# Altium PCB LED-kube-kontrollerkort_v0-0-1.PcbDoc
Units mm, origin at the board's own origin, x right, y up, seen from the top; angles counter-clockwise.
Board outline 60 x 72 mm, 2 copper layers (Top Layer, Bottom Layer); 18 components, 54 nets, 170 pads, 20 vias.
Unrouted connection lines stored in the file: 21.
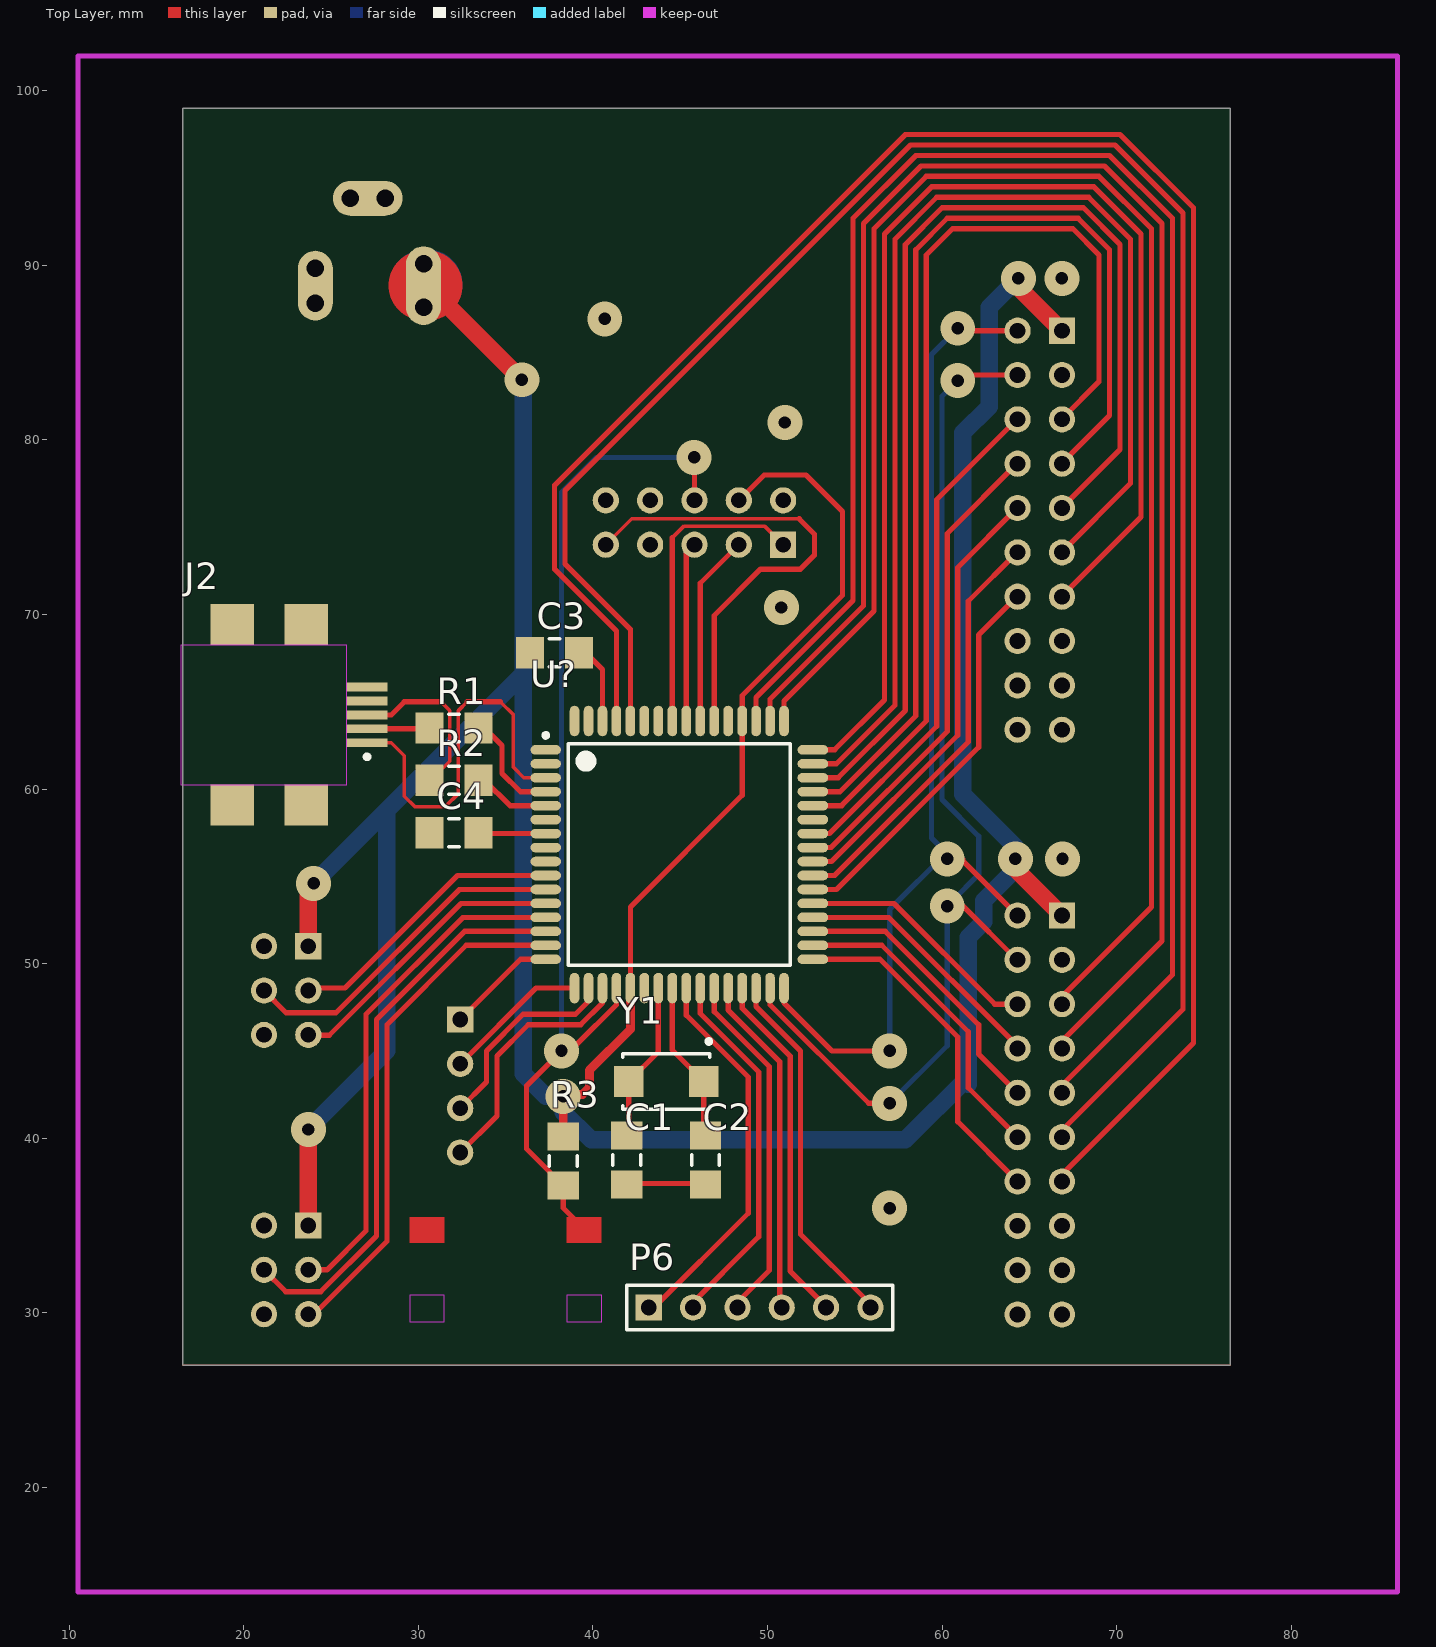
[diagram p0: Top Layer view]
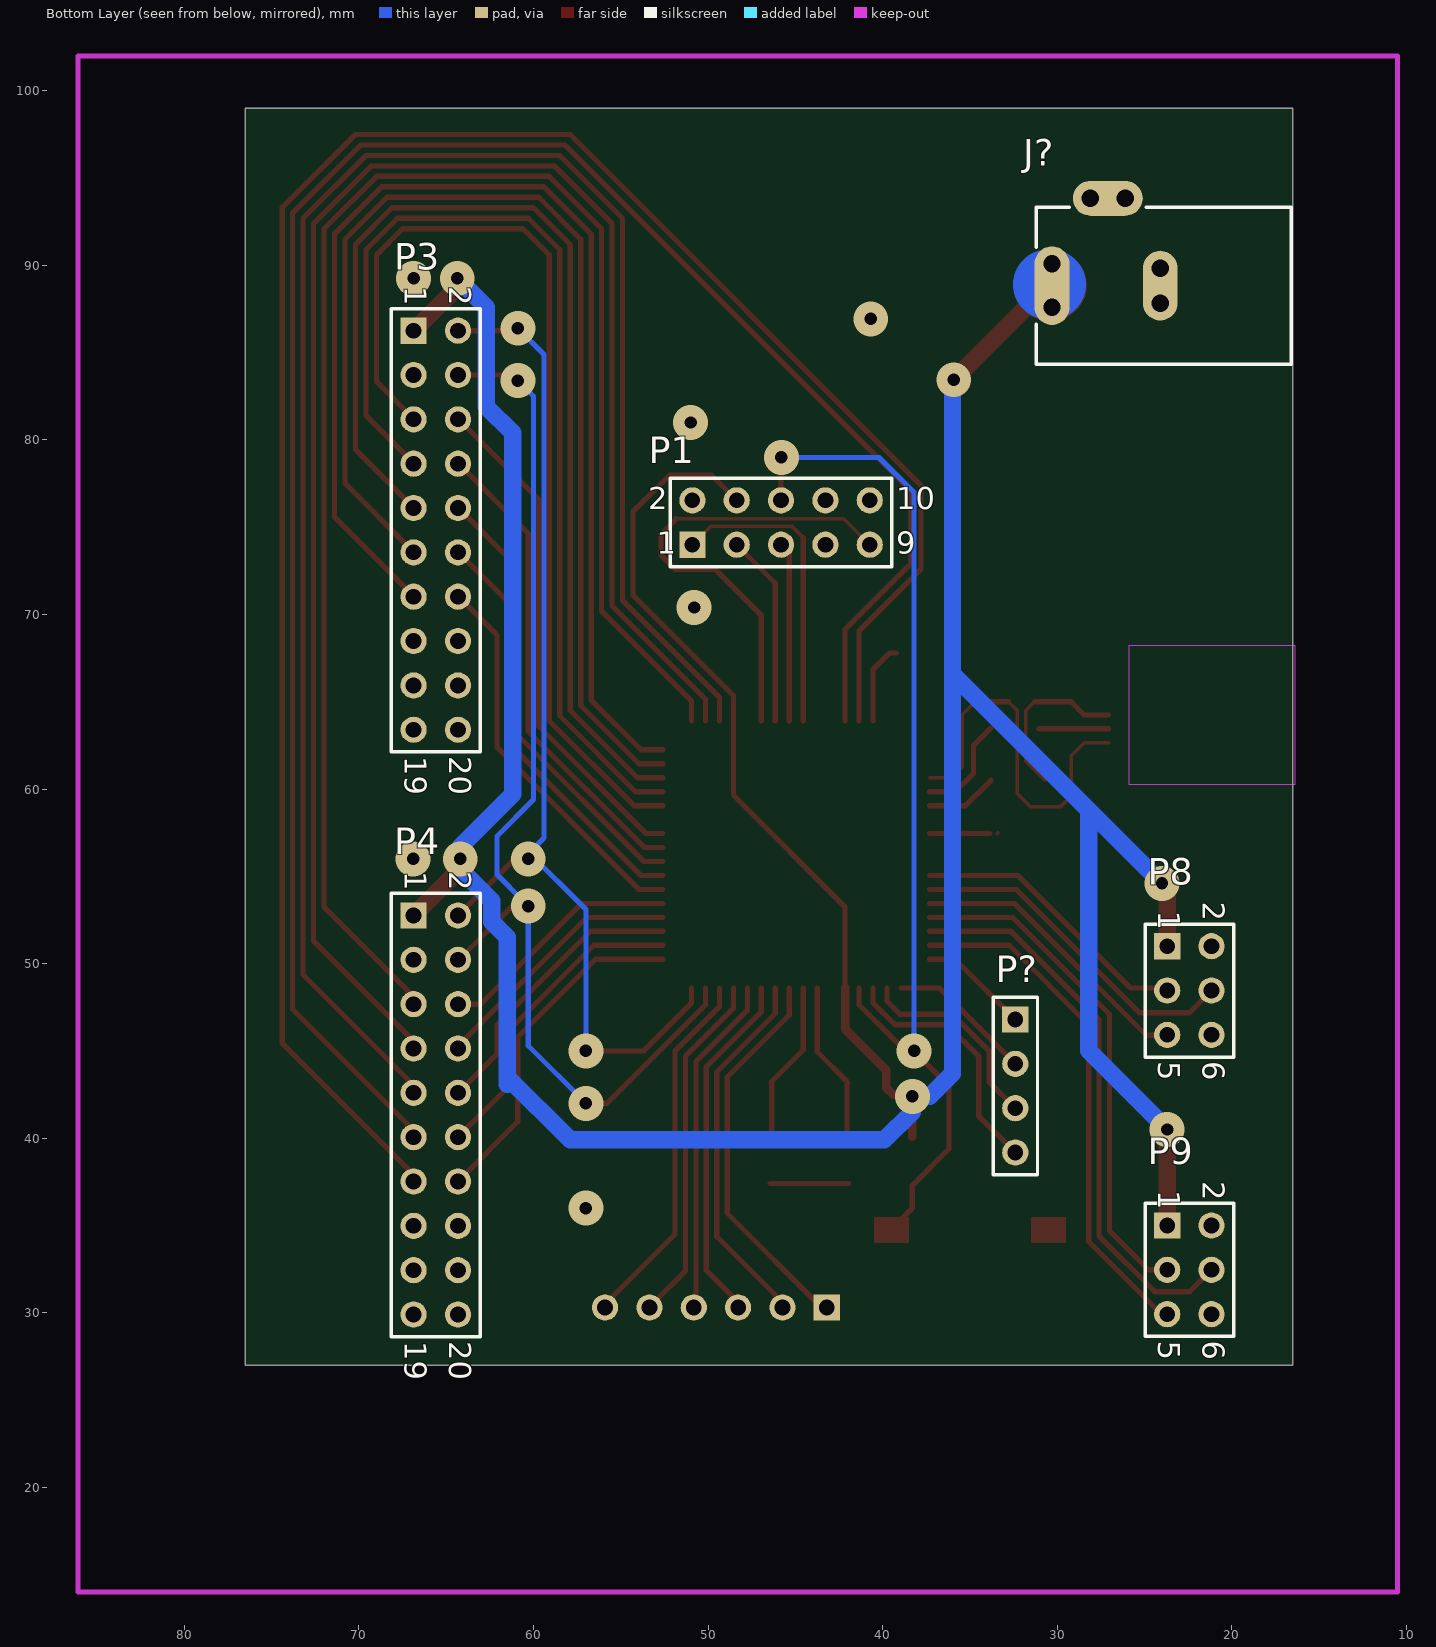
[diagram p1: Bottom Layer view, seen from below]

## Layer stack, top to bottom
Top Layer: signal copper 0.0356
Dielectric: core 0.32, FR-4, Dk 4.8
Bottom Layer: signal copper 0.0356

## Board outline
76.5,99 76.5,27 16.5,27 16.5,99

## Design rules (kind name [scope] priority, off if disabled: settings)
AssemblyTestPointUsage [All] p1 off:
AssemblyTestpoint [All] p1 off: testpointundercomponent=TRUE minsize=1.016 maxsize=2.54 preferedsize=1.524 minholesize=0 maxholesize=1.016 preferedholesize=0.813 testpointgrid=0.025 usegrid=TRUE gridtolerance=0 allowsidetop=TRUE allowsidebottom=TRUE
Clearance [All] p1: gap=0.2
DiffPairsRouting [All] p1: maxlimit=0.254 minlimit=0.254 mostfreqgap=0.254 maxuncoupledlength=12.7
FabricationTestPointUsage [All] p1 off: valid=0 allowmultiple=FALSE
FabricationTestpoint [All] p1 off: side=3 testpointundercomponent=TRUE minsize=1.016 maxsize=2.54 preferedsize=1.524 minholesize=0 maxholesize=1.016 preferedholesize=0.813 testpointgrid=0.025 allowsidetop=TRUE allowsidebottom=TRUE usegrid=TRUE gridtolerance=0
Height [All] p1 off: minheight=0 maxheight=25.4 prefheight=12.7
HoleToHoleClearance [All] p1: gap=0.2 allowstackedmicrovias=TRUE
MinimumSolderMaskSliver [All] p1 off: minsoldermaskwidth=0.254
PasteMaskExpansion [All] p1 off: expansion=0
PlaneClearance [All] p1: clearance=0.5
PlaneConnect [All] p1: planeconnectstyle=Relief reliefexpansion=0.508 reliefentries=4 reliefconductorwidth=0.3 reliefairgap=0.3
PolygonConnect [All] p1: connectstyle=Relief reliefconductorwidth=0.3 reliefentries=4 polygonreliefangle="90 Angle"
RoomDefinition LED-kube-kontrollerkort_v0-0-1 [InComponentClass('LED-kube-kontrollerkort_v0-0-1')] p1 off: confinementstyle=ConfineIn formatcopy=TRUE lockcomponents=FALSE outline 94.888,51.915 178.2,51.915 178.2,84.3 94.888,84.3
RoutingVias [All] p1: holewidth=1 width=2 viastyle="Through Hole" minholewidth=0.5 minwidth=1 maxholewidth=1 maxwidth=2.5
SMDToPlane [All] p1: distance=118110
SilkToSilkClearance [All] p1 off: silktosilkclearance=0.254
SilkscreenOverComponentPads [All] p1 off: minsilkscreentomaskgap=0.254
SolderMaskExpansion [All] p1 off: expansion=0.102
Width [All] p1: maxlimit=2 minlimit=0.2 preferedwidth=0.3
15 further rules are at their usual default settings.

## Classes and differential pairs
differential pair D: +D_P -D_N
differential pair D1: +D1_P -D1_N

## Components (designator, comment, footprint, x,y, rotation, side; value= is the part's Value field where it differs from the comment)
C1 "Cap Semi" 8-1206 41.95,38.75 r90 top
C2 "Cap Semi" 8-1206 46.45,38.75 r90 top
C3 "Cap Semi" 8-1206 37.8,67.8 r0 top
C4 "Cap Semi" 8-1206 32.05,57.5 r0 top
J2 "Mini_USB" 481900001 23.2,64.25 r180 top
J? "PWR2.5" KLD-0202 16.6,88.84 r0 bottom
P1 "JTAG" HDR2X5 50.9,74 r180 bottom
P3 "Header 10X2" HDR2X10 66.87,86.26 r270 bottom
P4 "Header 10X2" HDR2X10 66.87,52.76 r270 bottom
P6 "UART" HDR1X6 43.2,30.3 r0 top
P8 "NES_A" HDR2X3 23.7,51 r270 bottom
P9 "NES_B" HDR2X3 23.7,35 r270 bottom
P? "Header 4" HDR1X4 32.4,46.8 r270 bottom
R1 "" 8-1206 32.05,63.5 r0 top
R2 "" 8-1206 32.05,60.5 r0 top
R3 "5k" 8-1206 38.3,38.7 r270 top
U? "AT90USB1287-AU" 64MD_N 44.95,56.25 r0 top
Y1 "4SMX" 4SMX 44.2,43.25 r180 top

## Footprints (in the part's own frame and the unit in brackets; to place one, negate y for a bottom-side part, rotate by r counter-clockwise, add the part's x,y. Pads: shape width x height; smd on the part's side, far side on the other; paste and mask are expansions set on the pad)
4SMX [mm] "Surface Mount Quartz Crystal; Body 5.2 x 3.4 mm (LxW max)"
  rect 1.7x1.8 smd: 1(-2.15,0) 2(2.15,0)
  silkscreen extent -2.57,-2.42 2.5,1.6
8-1206 [mm] "Chip Resistor; Body 3.1 x 1.6 mm (LxW typ)"
  rect 1.6x1.8 smd: 1(-1.4,0) 2(1.4,0)
  silkscreen extent -0.3,-0.8 0.3,0.8
64MD_N [mm] "Thin QFP, 64-Leads, Body 14x14mm, Pitch 0.8mm, IPC Medium Density"
  oval 1.75x0.55 smd: 1(-7.65,6) 2(-7.65,5.2) 3(-7.65,4.4) 4(-7.65,3.6) 5(-7.65,2.8) 6(-7.65,2) 7(-7.65,1.2) 8(-7.65,0.4) 9(-7.65,-0.4) 10(-7.65,-1.2) 11(-7.65,-2) 12(-7.65,-2.8) 13(-7.65,-3.6) 14(-7.65,-4.4) 15(-7.65,-5.2) 16(-7.65,-6) 33(7.65,-6) 34(7.65,-5.2) 35(7.65,-4.4) 36(7.65,-3.6) 37(7.65,-2.8) 38(7.65,-2) 39(7.65,-1.2) 40(7.65,-0.4) 41(7.65,0.4) 42(7.65,1.2) 43(7.65,2) 44(7.65,2.8) 45(7.65,3.6) 46(7.65,4.4) 47(7.65,5.2) 48(7.65,6)
  oval 0.55x1.75 smd: 17(-6,-7.65) 18(-5.2,-7.65) 19(-4.4,-7.65) 20(-3.6,-7.65) 21(-2.8,-7.65) 22(-2,-7.65) 23(-1.2,-7.65) 24(-0.4,-7.65) 25(0.4,-7.65) 26(1.2,-7.65) 27(2,-7.65) 28(2.8,-7.65) 29(3.6,-7.65) 30(4.4,-7.65) 31(5.2,-7.65) 32(6,-7.65) 49(6,7.65) 50(5.2,7.65) 51(4.4,7.65) 52(3.6,7.65) 53(2.8,7.65) 54(2,7.65) 55(1.2,7.65) 56(0.4,7.65) 57(-0.4,7.65) 58(-1.2,7.65) 59(-2,7.65) 60(-2.8,7.65) 61(-3.6,7.65) 62(-4.4,7.65) 63(-5.2,7.65) 64(-6,7.65)
  silkscreen extent -7.77,-6.35 6.35,6.95, body extent -7,-7 7,7, height 1.2
481900001 [mm] "Connector; USB Mini-B, Sinking Type, SM; 5 Position; Right Angle"
  rect 2.35x0.5 smd: 1(-3.862,1.6) 2(-3.863,0.8) 3(-3.863,0) 4(-3.863,-0.8) 5(-3.863,-1.6)
  rect 2.5x2.35 smd: MH1(-0.387,-5.175) MH2(3.862,-5.175) MH3(3.862,5.175) MH4(-0.387,5.175)
  Keep-Out Layer region: -2.687,-4 6.813,-4 6.813,4 -2.687,4
  silkscreen extent -3.99,2.28 -3.74,2.52, body extent -1.8,-3.84 6.8,3.86, height 0.35
HDR1X4 [mm] "Connector; Header; 4 Position"
  rect 1.5x1.5 hole 0.9: 1(0,0)
  round 1.5 hole 0.9: 2(2.54,0) 3(5.08,0) 4(7.62,0)
  silkscreen extent -1.27,-1.27 8.89,1.27
HDR1X6 [mm] "Connector; Header; 6 Position"
  rect 1.5x1.5 hole 0.9: 1(0,0)
  round 1.5 hole 0.9: 2(2.54,0) 3(5.08,0) 4(7.62,0) 5(10.16,0) 6(12.7,0)
  silkscreen extent -1.27,-1.27 13.97,1.27
HDR2X3 [mm] "Connector; Header; 3x2 Position"
  rect 1.5x1.5 hole 0.9: 1(0,0)
  round 1.5 hole 0.9: 2(0,2.54) 3(2.54,0) 4(2.54,2.54) 5(5.08,0) 6(5.08,2.54)
  silkscreen extent -1.27,-1.27 6.35,3.81
HDR2X5 [mm] "Connector; Header; 5x2 Position"
  rect 1.5x1.5 hole 0.9: 1(0,0)
  round 1.5 hole 0.9: 2(0,2.54) 3(2.54,0) 4(2.54,2.54) 5(5.08,0) 6(5.08,2.54) 7(7.62,0) 8(7.62,2.54) 9(10.16,0) 10(10.16,2.54)
  silkscreen extent -1.27,-1.27 11.43,3.81
HDR2X10 [mm] "Connector; Header; 10x2 Position"
  rect 1.5x1.5 hole 0.9: 1(0,0)
  round 1.5 hole 0.9: 2(0,2.54) 3(2.54,0) 4(2.54,2.54) 5(5.08,0) 6(5.08,2.54) 7(7.62,0) 8(7.62,2.54) 9(10.16,0) 10(10.16,2.54) 11(12.7,0) 12(12.7,2.54) 13(15.24,0) 14(15.24,2.54) 15(17.78,0) 16(17.78,2.54) 17(20.32,0) 18(20.32,2.54) 19(22.86,0) 20(22.86,2.54)
  silkscreen extent -1.27,-1.27 24.13,3.81
KLD-0202 [mm] "DC Power Jack, 2.5mm, KLD Series, PCB Mount"
  oval 2x4.5 all layers, no hole: 1(13.7,0)
  round 1.5 hole 1: 1A(13.7,-1.25) 1B(13.7,1.25) 2A(7.5,-1) 2B(7.5,1) 3A(9.5,-5) 3B(11.5,-5)
  oval 2x4 all layers, no hole: 2(7.5,0)
  oval 4x2 all layers, no hole: 3(10.5,-5)
  silkscreen extent 0,-4.5 14.6,4.5

## Part data
C1 C2 C3 C4: "Capacitor (Semiconductor SIM Model)"
J2: "USB 2.0, Right Angle, SMT, B Type, Receptacle, 5 Position, Black"
J?: "Low Voltage Power Supply Connector"
P1: library part "Header 5X2", "Header, 5-Pin, Dual row"
P3 P4: "Header, 10-Pin, Dual row"
P6: library part "Header 6", "Header, 6-Pin"
P8 P9: library part "Header 3X2", "Header, 3-Pin, Dual row"
P?: "Header, 4-Pin"
R1 R2: library part Res3, "Resistor"
R3: library part ERJP08J, "Anti-Surge Thick Film Chip Resistor, 10 Ohm to 1M Ohm Range, 5% Tolerance, 1206 Size, 0.25 W"
U?: "8-bit AVR Microcontroller, 2.7-5.5V, 128KB Flash, 4KB EEPROM, 8KB SRAM, USB OTG Host, 64-pin TQFP, Industrial Grade (-40°C to 85°C)"
Y1: "Surface Mount Quartz Crystal"

## Via types
v1: diameter 2, hole 0.711, Top Layer to Bottom Layer, 20 vias

## Nets (pads, with @x,y where several pads share a name; then routed paths per layer and width w, separated by ;. In a path a pad name is that pad's centre, name@x,y a point inside that pad or via, vN(x,y) a via of type N, cw(c..) or ccw(c..) an arc to the next point about the centre after c; other vN are vias at no path point)
C0: P4.13 U?.61 | length 120.1
  Top Layer w0.3: U?.61 41.35,69.05 37.8,72.6 37.8,77.4 57.9,97.5 70.2,97.5 74.4,93.3 74.4,45.45 P4.13@66.87,37.92
C1: P4.11 U?.60 | length 115.4
  Top Layer w0.3: U?.60 42.15,69.15 38.4,72.9 38.4,77.1 58.2,96.9 69.9,96.9 73.8,93 73.8,47.39 P4.11@66.87,40.46
C2: P4.9 U?.51 | length 104.6
  Top Layer w0.3: U?.51 49.35,65.25 54.9,70.8 54.9,92.7 58.5,96.3 69.6,96.3 73.2,92.7 73.2,49.36 P4.9@66.9,43.06
C3: P4.7 U?.50 | length 99.7
  Top Layer w0.3: U?.50 50.15,65.15 55.5,70.5 55.5,92.4 58.8,95.7 69.3,95.7 72.6,92.4 72.6,51.3 P4.7@66.9,45.6
C4: P4.5 U?.49 | length 94.8
  Top Layer w0.3: U?.49 50.95,65.05 56.1,70.2 56.1,92.1 59.1,95.1 69,95.1 72,92.1 72,53.24 P4.5@66.9,48.14
C5: P3.13 U?.48 | length 71.5
  Top Layer w0.3: U?.48 53.85,62.25 56.7,65.1 56.7,91.8 59.4,94.5 68.7,94.5 71.4,91.8 71.4,75.58 P3.13@66.9,71.08
C6: P3.11 U?.47 | length 67.8
  Top Layer w0.3: U?.47 53.95,61.45 57.3,64.8 57.3,91.5 59.7,93.9 68.4,93.9 70.8,91.5 70.8,77.52 P3.11@66.9,73.62
C7: P3.9 U?.46 | length 64
  Top Layer w0.3: U?.46 54.05,60.65 57.9,64.5 57.9,91.2 60,93.3 68.1,93.3 70.2,91.2 70.2,79.46 P3.9@66.9,76.16
C8: P3.7 U?.45 | length 60.3
  Top Layer w0.3: U?.45 54.15,59.85 58.5,64.2 58.5,90.9 60.3,92.7 67.8,92.7 69.6,90.9 69.6,81.4 P3.7@66.9,78.7
C9: P3.5 U?.44 | length 56.6
  Top Layer w0.3: U?.44 54.25,59.05 59.1,63.9 59.1,90.6 60.6,92.1 67.5,92.1 69,90.6 69,83.34 P3.5@66.9,81.24
D1_N: J2.2 R1.1 | length 4.1
  Top Layer w0.2: R1.1@30.65,63.45 R1.1@30.7,63.5
  Top Layer w0.3: J2.2 R1.1@31.05,63.45
D1_P: J2.3 R2.1 | length 9.7
  Top Layer w0.2: R2.1@30.7,60.5 31.8,61.6 31.8,64.5 31.3,65
  Top Layer w0.3: J2.3 28.45,64.25 29.2,65 31.3,65
D_N: R1.2 U?.4 | length 5.9
  Top Layer w0.3: R1.2@33.8,63.5 34.8,62.5 34.8,60.9 35.85,59.85 U?.4
D_P: R2.2 U?.5 | length 4.1
  Top Layer w0.3: R2.2@33.8,60.5 35.25,59.05 U?.5
GND: C1.1 C2.1 C3.1 C4.1 J2.4 J2.5 J?.2 J?.2A J?.2B J?.3 J?.3A J?.3B P1.2 P1.10 P3.3 P4.3 P8.2 P9.2 U?.22 U?.53 U?.63 | length 4.5
  Top Layer w0.3: C1.1@41.95,37.4 C2.1@46.45,37.4
  other v1: 57,36 66.9,56 50.8,70.4 51,81 40.68,86.94 66.87,89.26
L0: P3.6 U?.42 | length 29.2
  Top Layer w0.3: U?.42 53.55,57.45 59.7,63.6 59.7,76.58 P3.6@64.36,81.24
L1: P3.8 U?.41 | length 27.5
  Top Layer w0.3: U?.41 53.65,56.65 60.3,63.3 60.3,74.64 P3.8@64.36,78.7
L2: P3.10 U?.40 | length 25.8
  Top Layer w0.3: U?.40 53.67,55.85 60.9,63.08 60.9,72.7 P3.10@64.36,76.16
L3: P3.12 U?.39 | length 24.2
  Top Layer w0.3: U?.39 53.85,55.05 61.5,62.7 61.5,70.76 P3.12@64.36,73.62
L4: P3.14 U?.38 | length 22.5
  Top Layer w0.3: U?.38 53.95,54.25 62.1,62.4 62.1,68.82 P3.14@64.36,71.08
L5: P4.6 U?.37 | length 14.1
  Top Layer w0.3: U?.37 57.25,53.45 63.02,47.68 P4.6
L6: P4.8 U?.36 | length 14.7
  Top Layer w0.3: U?.36 56.95,52.65 64.06,45.54 P4.8@64.33,45.54
L7: P4.10 U?.35 | length 16.5
  Top Layer w0.3: U?.35 56.75,51.85 62.1,46.5 62.1,44.83 P4.10
L8: P4.12 U?.34 | length 18.2
  Top Layer w0.3: U?.34 56.55,51.05 61.5,46.1 61.5,42.89 P4.12
L9: P4.14 U?.33 | length 19.8
  Top Layer w0.3: U?.33 56.45,50.25 60.9,45.8 60.9,40.95 P4.14
NES_A_CLOCK: P8.4 U?.11 | length 19.6
  Top Layer w0.3: P8.4 22.43,47.19 25.29,47.19 32.35,54.25 U?.11
NES_A_DATA: P8.5 U?.12 | length 16.7
  Top Layer w0.3: P8.5@23.72,45.9 24.9,45.9 32.45,53.45 U?.12
NES_A_STROBE: P8.3 U?.10 | length 16.3
  Top Layer w0.3: P8.3 23.84,48.6 25.8,48.6 32.25,55.05 U?.10
NES_B_CLOCK: P9.4 U?.14 | length 32.5
  Top Layer w0.3: P9.4 22.41,31.21 24.41,31.21 27.6,34.4 27.6,46.8 32.65,51.85 U?.14
NES_B_DATA: P9.5 U?.15 | length 29.6
  Top Layer w0.3: P9.5 24.02,29.92 28.2,34.1 28.2,46.5 32.75,51.05 U?.15
NES_B_STROBE: P9.3 U?.13 | length 29.2
  Top Layer w0.3: P9.3 24.76,32.46 27,34.7 27,47.1 32.55,52.65 U?.13
NetC1_2: C1.2 U?.23 Y1.2 | length 9.4
  Top Layer w0.2: C1.2@41.95,40.1 C1.2@42.05,40.2 ; Y1.2@41.95,43.15 Y1.2
  Top Layer w0.3: C1.2@42.05,40.2 Y1.2 43.75,44.95 U?.23
NetC2_2: C2.2 U?.24 Y1.1 | length 9.4
  Top Layer w0.2: C2.2@46.35,40.2 C2.2@46.45,40.1 ; Y1.1 Y1.1@46.45,43.15
  Top Layer w0.3: U?.24 44.55,45.05 Y1.1 C2.2@46.35,40.2
NetC3_2: C3.2 U?.62 | length 4.7
  Top Layer w0.3: C3.2 39.6,67.8 40.55,66.85 U?.62
NetC4_2: C4.2 U?.7 | length 3.5
  Top Layer w0.2: C4.2@33.4,57.5 C4.2@33.45,57.45
  Top Layer w0.3: C4.2@33.85,57.45 U?.7
PB6: P?.1 U?.16 | length 6.3
  Top Layer w0.3: P?.1 35.85,50.25 U?.16
PB7: P?.2 U?.17 | length 8.3
  Top Layer w0.3: P?.2 36.74,48.6 U?.17
PD0: P6.1 U?.25 | length 22.6
  Top Layer w0.3: P6.1@42.9,30.3 43.5,30.3 48.9,35.7 48.9,43.5 45.35,47.05 U?.25
PD1: P6.2 U?.26 | length 21.4
  Top Layer w0.3: P6.2@45.44,30.3 49.5,34.36 49.5,43.8 46.15,47.15 U?.26
PD2: P6.3 | length 20.5
  Top Layer w0.3: 46.95,48.6 46.95,47.25 50.1,44.1 50.1,32.42 P6.3@47.98,30.3
PD3: P6.4 | length 19.5
  Top Layer w0.3: 47.75,48.6 47.75,47.35 50.7,44.4 P6.4@50.7,30.3
PD4: P6.5 U?.29 | length 20.2
  Top Layer w0.3: U?.29 48.55,47.45 51.3,44.7 51.3,32.4 53.06,30.64 P6.5@53.06,30.3
PD5: P6.6 U?.30 | length 20.9
  Top Layer w0.3: U?.30 49.35,47.55 51.9,45 51.9,34.5 55.6,30.8 P6.6@55.6,30.3
PE4: P?.3 U?.18 | length 11.7
  Top Layer w0.3: P?.3 33.9,43.22 33.9,45 36,47.1 39,47.1 39.75,47.85 U?.18
PE5: P?.4 U?.19 | length 14.6
  Top Layer w0.3: P?.4 34.5,41.28 34.5,44.7 36.3,46.5 39.3,46.5 40.55,47.75 U?.19
RCK: P3.4 P4.4 U?.31 | length 63.3
  Top Layer w0.3: U?.31 50.15,47.65 55.8,42 v1(57,42) ; v1(60.3,53.3) 61.2,53.3 64.28,50.22 P4.4 ; v1@61.82,83.72 P3.4
  Bottom Layer w0.3: v1(57,42) 60.3,45.3 v1(60.3,53.3) 60,53.6 60.6,53.6 62.1,55.1 62.1,57.3 60,59.4 60,82.5 v1(60.9,83.4)
RESET: P1.6 R3.2 U?.20 | length 60.5
  Top Layer w0.3: v1@38,45.4 39.1,45.4 41.35,47.65 U?.20 ; v1(38.2,45) 36.2,43 36.2,39.4 R3.2 38.3,36 39.5,34.8 ; P1.6 v1@45.82,78.98
  Bottom Layer w0.3: v1(38.2,45) 38.2,77 40.2,79 v1(45.8,79)
SCK: P3.2 P4.2 U?.32 | length 60.3
  Top Layer w0.3: U?.32 50.95,47.75 53.7,45 v1(57,45) ; v1(60.3,56) 61.2,56 61.2,55.89 P4.2 ; v1@61.64,86.26 P3.2
  Bottom Layer w0.3: v1(57,45) 57,53.1 v1@60.3,56.4 ; v1(60.3,56) 60.3,56.3 59.4,57.2 59.4,84.9 v1(60.9,86.4)
TCK: P1.1 U?.57 | length 17.6
  Top Layer w0.2: 44.564,74.414 45.22,75.07 49.83,75.07 P1.1
  Top Layer w0.3: U?.57 44.55,74.414
TDI: P1.9 U?.54 | length 27.4
  Top Layer w0.2: P1.9 42.22,75.48 51.82,75.48
  Top Layer w0.3: U?.54 46.95,69.95 49.6,72.6 51.9,72.6 52.7,73.4 52.7,74.6 51.82,75.48
TDO: P1.3 U?.55 | length 11
  Top Layer w0.3: U?.55 46.15,71.79 P1.3
TMS: P1.5 U?.56 | length 9.6
  Top Layer w0.3: U?.56 P1.5@45.35,73.53
V-USB: J2.1 U?.3 | length 21.9
  Top Layer w0.2: J2.1 28.45,62.65 29.2,61.9 29.2,59.6 29.8,59 31.55,59 32.3,59.75 32.3,64.5 32.8,65 ; 34.7,65 35.45,64.25 35.45,61.25 36.05,60.65 U?.3
  Top Layer w0.3: 32.8,65 34.7,65
VCC: J?.1 J?.1A J?.1B P1.4 P3.1 P4.1 P8.1 P9.1 R3.1 U?.21 U?.52 | length 230.2
  Top Layer w0.3: U?.21 42.15,53.25 48.55,59.65 U?.52 48.55,65.35 54.3,71.1 54.3,75.9 52.2,78 49.82,78 P1.4
  Top Layer w0.5: R3.1 v1(38.3,42.4) 38.4,42.5 39.4,42.5 39.8,42.9 39.8,43.9 42.15,46.25 U?.21
  Top Layer w1: P9.1 23.7,39.5 ; P8.1 23.7,54.3 v1(24,54.6) ; J?.1@30.54,88.84 v1(35.93,83.45) v1@35.93,82.96 ; v1(64.2,56) 64.2,55.43 P4.1 ; v1@64.37,88.76 P3.1
  Top Layer w4: J?.1 J?.1@30.54,88.84
  Bottom Layer w1: v1(23.7,40.5) 28.2,45 28.2,58.8 ; v1(24,54.6) 28.2,58.8 ; v1@36,83.14 36,66.6 ; 61.5,43.1 61.5,43.5 ; v1@64.2,56.3 v1(64.2,56) 64.2,55.4 62.4,53.6 62.4,52.4 61.5,51.5 61.5,43.5 ; v1@64.2,56.7 61.2,59.7 61.2,80.4 62.7,81.9 62.7,87.59 v1(64.37,89.26) ; 28.2,58.8 36,66.6 ; 36,66.6 36,43.7 37.3,42.4 v1(38.3,42.4) 38.3,41.5 39.9,39.9 57.9,39.9 61.5,43.5
  Bottom Layer w4: J?.1@30.36,88.9 J?.1@30.54,88.9
pads on no net: J2.MH1 J2.MH2 J2.MH3 J2.MH4 P1.7 P1.8 P3.15 P3.16 P3.17 P3.18 P3.19 P3.20 P4.15 P4.16 P4.17 P4.18 P4.19 P4.20 P8.6 P9.6 U?.1 U?.2 U?.6 U?.8 U?.9 U?.27 U?.28 U?.43 U?.58 U?.59 U?.64

## Polygon pours and split planes (outlines as drawn)
GND on Top Layer "GND" (solid, shelved, pour order 2): 16.5,27 16.5,99 76.5,99 76.5,27 16.5,27
GND on Bottom Layer "GND" (solid, shelved, pour order 4): 16.5,27 16.5,99 76.5,99 76.5,27 16.5,27

## Keep-outs
Top Layer:
  region net GND: 40.5,31 38.5,31 38.5,29.5 40.5,29.5
  region net GND: 31.5,31 29.5,31 29.5,29.5 31.5,29.5
Keep-Out Layer:
  lines w0.3: 10.5,14 10.5,102 86.1,102 86.1,14 10.5,14
  text "." at 72.43,86.41 h1.52
  text "." at 37.32,63.855 h1.52 r90
  text "." at 29.27,53.03 h1.52 r90

## Other copper
Top Layer:
  region: 31.5,35.5 29.5,35.5 29.5,34 31.5,34
  region net RESET: 40.5,35.5 38.5,35.5 38.5,34 40.5,34

## Dimensions
22.2,14 to 22.2,102 on Mechanical 1
10.5,14 to 86.1,14 on Mechanical 1

## Text inside footprints (layer, text, board x,y; h text height)
P1: Bottom Overlay "10" at 39.216,76.032 h1.27; Bottom Overlay "9" at 39.216,73.492 h1.27; Bottom Overlay "1" at 52.932,73.492 h1.27; Bottom Overlay "2" at 53.44,76.032 h1.27
P3: Bottom Overlay "20" at 64.838,61.876 h1.27 r90; Bottom Overlay "19" at 67.378,61.876 h1.27 r90; Bottom Overlay "1" at 67.378,88.8 h1.27 r90; Bottom Overlay "2" at 64.838,88.8 h1.27 r90
P4: Bottom Overlay "20" at 64.838,28.376 h1.27 r90; Bottom Overlay "19" at 67.378,28.376 h1.27 r90; Bottom Overlay "1" at 67.378,55.3 h1.27 r90; Bottom Overlay "2" at 64.838,55.3 h1.27 r90
P8: Bottom Overlay "6" at 21.668,44.396 h1.27 r90; Bottom Overlay "5" at 24.208,44.396 h1.27 r90; Bottom Overlay "2" at 21.668,53.54 h1.27 r90; Bottom Overlay "1" at 24.208,53.032 h1.27 r90
P9: Bottom Overlay "6" at 21.668,28.396 h1.27 r90; Bottom Overlay "5" at 24.208,28.396 h1.27 r90; Bottom Overlay "2" at 21.668,37.54 h1.27 r90; Bottom Overlay "1" at 24.208,37.032 h1.27 r90